# Altium PCB ludi_console_v1.PcbDoc
Units mil, origin at the board's own origin, x right, y up, seen from the top; angles counter-clockwise.
Board outline 2980.38 x 1980.03 mil, 2 copper layers (Top Layer, Bottom Layer); 18 components, 24 nets, 75 pads, 0 vias.
Unrouted connection lines stored in the file: 37.
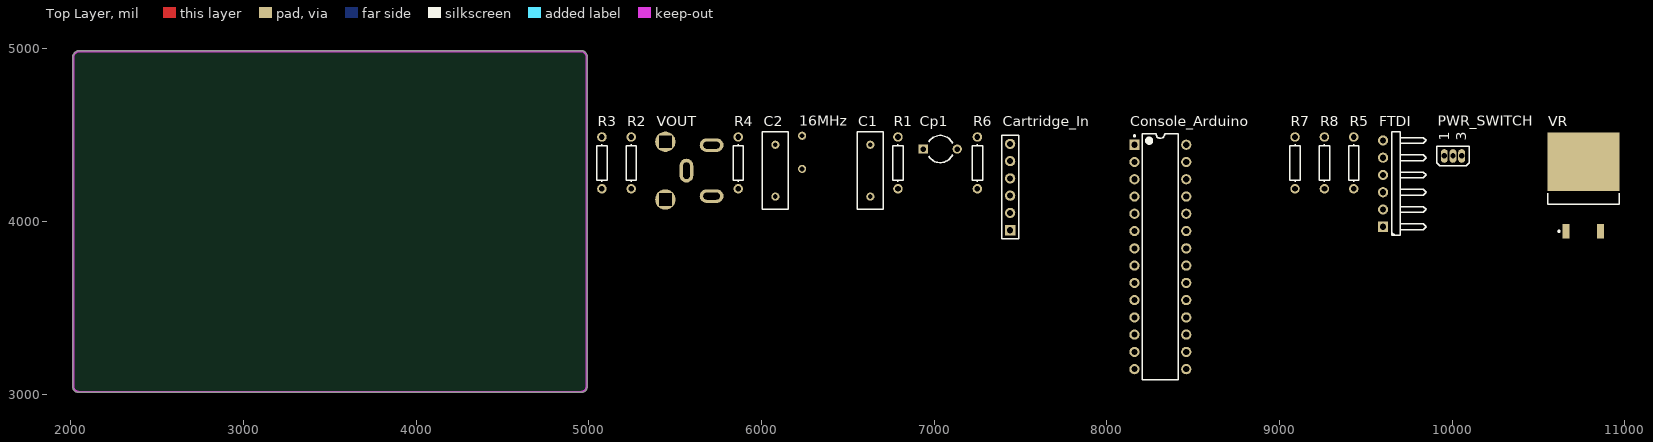
[diagram p0: Top Layer view]
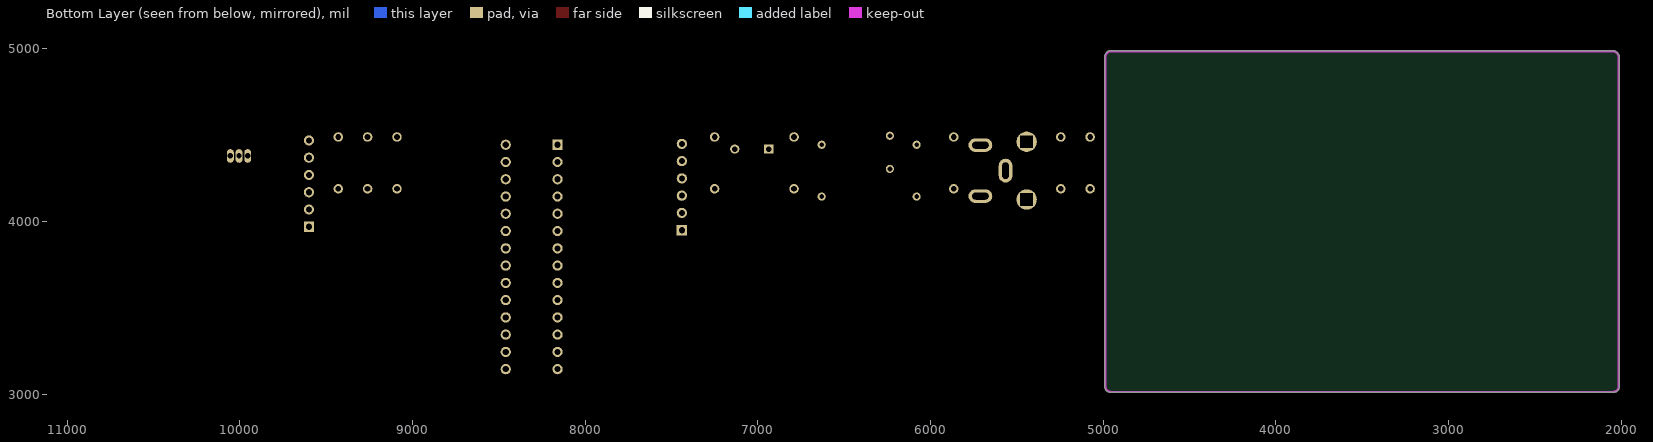
[diagram p1: Bottom Layer view, seen from below]

## Layer stack, top to bottom
Top Layer: signal copper 1.4
Dielectric: dielectric 12.6, FR-4, Dk 4.8
Bottom Layer: signal copper 1.4

## Board outline
2009.98,3045 2009.98,4944.66 cw(c2050,4950) 2010.04,4955.71 cw(c2050,4950) 2044.29,4989.96 cw(c2045,4985) 2045.03,4990.02 4955,4990.02 cw(c4955,4955) 4990.02,4955 4990.02,3045 cw(c4955,3045) 4955,3009.99 2045,3009.99 cw(c2045,3045)

## Design rules (kind name [scope] priority, off if disabled: settings)
Clearance [All] p1: gap=6
PolygonConnect [All] p1: connectstyle=Relief reliefconductorwidth=10 reliefentries=4 polygonreliefangle="90 Angle"
RoomDefinition ludi_console_v1 [InComponentClass('ludi_console_v1')] p1: confinementstyle=ConfineIn formatcopy=TRUE lockcomponents=FALSE outline 5035,3070 10980,3070 10980,4630 5035,4630
RoutingVias [All] p1: holewidth=13 width=30 viastyle="Through Hole" minholewidth=28 minwidth=50 maxholewidth=28 maxwidth=50
SilkscreenOverComponentPads [All] p1: minsilkscreentomaskgap=10
SolderMaskExpansion [All] p1: expansion=4
Width [All] p1: maxlimit=6 minlimit=6 preferedwidth=6
27 further rules are at their usual default settings.

## Components (designator, comment, footprint, x,y, rotation, side; value= is the part's Value field where it differs from the comment)
16MHz "Crystal" "Crystal - duplicate" 6235,4305 r90 top
C1 "Cap" RAD-0.3 6630,4295 r90 top
C2 "Cap" RAD-0.3 6080,4295 r90 top
Cartridge_In "Header 6" HDR1X6 7440,3950 r90 top
Console_Arduino "Atmega328" DIP-28 8310,3795 r0 top
Cp1 "Cap2" CAPR5-4X5 7035,4420 r0 top
FTDI "Header 6H" HDR1X6H 9600,3970 r90 top
PWR_SWITCH "MOSFET-N" E3 10005,4380 r90 top
R1 "Res1" AXIAL-0.3 6790,4340 r90 top
R2 "Res1" AXIAL-0.3 5245,4340 r90 top
R3 "Res1" AXIAL-0.3 5075,4340 r90 top
R4 "Res1" AXIAL-0.3 5865,4340 r90 top
R5 "Res1" AXIAL-0.3 9430,4340 r90 top
R6 "Res1" AXIAL-0.3 7250,4340 r90 top
R7 "Res1" AXIAL-0.3 9090,4340 r90 top
R8 "Res1" AXIAL-0.3 9260,4340 r90 top
VOUT "RCA_Jack" RCA_Jack 5565,4295 r0 top
VR "Volt Reg" D2PAK_L 10760,4210 r90 top

## Footprints (in the part's own frame and the unit in brackets; to place one, negate y for a bottom-side part, rotate by r counter-clockwise, add the part's x,y. Pads: shape width x height; smd on the part's side, far side on the other; paste and mask are expansions set on the pad)
AXIAL-0.3 [mm] "Axial Device, Thru-Hole; 2 Leads; 0.3 in Pin Spacing"
  round 1.4 hole 0.85: 1(-3.81,0) 2(3.81,0)
  silkscreen extent -2.77,-0.76 2.77,0.76
CAPR5-4X5 [mm] "Capacitor; 2 Leads"
  rect 1.35x1.35 hole 0.8: 1(-2.5,0)
  round 1.35 hole 0.8: 2(2.5,0)
  silkscreen extent -1.69,-2 1.82,2
"Crystal - duplicate" [mm]
  round 1.2 hole 0.7: A(0,0) K(4.88,0)
D2PAK_L [mm] "D2-PAK, 4-Leads, Body 8.8x10.4mm, Pitch 2.54mm, Lead Span 15.1mm, IPC High Density"
  rect 2.1x1 smd: 1(-6.75,2.54) 3(-6.75,-2.54)
  rect 8.6x10.6 smd: 2(3.5,0)
  silkscreen extent -6.87,-5.25 -1.2,5.25, body extent -2.75,-5.28 6.25,5.28, height 4.69
DIP-28 [mm] "DIP, 28-Pin, Row Spacing 7.62 mm, Pitch 2.54 mm"
  rect 1.5x1.5 hole 0.9: 1(-3.81,16.51)
  round 1.5 hole 0.9: 2(-3.81,13.97) 3(-3.81,11.43) 4(-3.81,8.89) 5(-3.81,6.35) 6(-3.81,3.81) 7(-3.81,1.27) 8(-3.81,-1.27) 9(-3.81,-3.81) 10(-3.81,-6.35) 11(-3.81,-8.89) 12(-3.81,-11.43) 13(-3.81,-13.97) 14(-3.81,-16.51) 15(3.81,-16.51) 16(3.81,-13.97) 17(3.81,-11.43) 18(3.81,-8.89) 19(3.81,-6.35) 20(3.81,-3.81) 21(3.81,-1.27) 22(3.81,1.27) 23(3.81,3.81) 24(3.81,6.35) 25(3.81,8.89) 26(3.81,11.43) 27(3.81,13.97) 28(3.81,16.51)
  silkscreen extent -3.93,-18.1 2.65,18.1, body extent -3.55,-18.1 3.55,18.1, height 5.33
E3 [mm] "TO, Flat Index; 3 In-Line, Axial Leads; Body Dia. 4.6mm; Lead Dia. 0.5 mm (max)"
  oval 2x1 hole 0.8: 1(0,1.27) 2(0,0) 3(0,-1.27)
  silkscreen extent -1.41,-2.41 1.41,2.41
HDR1X6 [mm] "Connector; Header; 6 Position"
  rect 1.5x1.5 hole 0.9: 1(0,0)
  round 1.5 hole 0.9: 2(2.54,0) 3(5.08,0) 4(7.62,0) 5(10.16,0) 6(12.7,0)
  silkscreen extent -1.27,-1.27 13.97,1.27
HDR1X6H [mm] "Connector; Header; 6 Position; Right Angle"
  rect 1.5x1.5 hole 0.9: 1(0,0)
  round 1.5 hole 0.9: 2(2.54,0) 3(5.08,0) 4(7.62,0) 5(10.16,0) 6(12.7,0)
  silkscreen extent -1.27,-6.35 13.97,-1.27
RAD-0.3 [mm] "Radial Cap, Thru-Hole; 2 Leads; 0.3 in Pin Spacing"
  round 1.2 hole 0.7: 1(-3.81,0) 2(3.81,0)
  silkscreen extent -5.71,-1.91 5.71,1.91
RCA_Jack [mm]
  oval 2x3.5 hole 1 slot 2.4 at 90 deg mask+0.025: 1(0,0)
  oval 3.5x2 hole 1 slot 2.4 at 0 deg mask+0.025: 2(3.7,3.75) 3(3.7,-3.75)
  round 3 hole 1.8 square mask+0.025: 4(-3.1,4.25) 5(-3.1,-4.25)

## Part data
C1 C2 Cp1: "Capacitor"
Cartridge_In: "Header, 6-Pin"
FTDI: "Header, 6-Pin, Right Angle"
PWR_SWITCH: "N-Channel MOSFET"
R1 R2 R3 R4 R5 R6 R7 R8: "Resistor"
VR: "Voltage Regulator"

## Nets (pads, with @x,y where several pads share a name; then routed paths per layer and width w, separated by ;. In a path a pad name is that pad's centre, name@x,y a point inside that pad or via, vN(x,y) a via of type N, cw(c..) or ccw(c..) an arc to the next point about the centre after c; other vN are vias at no path point)
5V: Cartridge_In.4 Console_Arduino.7 Console_Arduino.20 Console_Arduino.21 FTDI.4 PWR_SWITCH.3
GND: C1.1 C2.1 Cartridge_In.6 Console_Arduino.8 Console_Arduino.22 Cp1.2 FTDI.6 R1.1 R4.2 R7.1 VOUT.1 VR.2
MONO_OUT: Console_Arduino.17
Net16MHz_A: 16MHz.A C2.2 Console_Arduino.10
Net16MHz_K: 16MHz.K C1.2 Console_Arduino.9
NetConsole_Arduino_11: Console_Arduino.11
NetConsole_Arduino_12: Console_Arduino.12
NetConsole_Arduino_13: Console_Arduino.13 R3.1
NetConsole_Arduino_14: Console_Arduino.14
NetConsole_Arduino_15: Console_Arduino.15 R2.1
NetConsole_Arduino_16: Console_Arduino.16
NetConsole_Arduino_18: Console_Arduino.18
NetConsole_Arduino_19: Console_Arduino.19
NetCp1_1: Cp1.1 R6.1
NetPOWER_1: R7.2 R8.1
NetPOWER_6: R4.1
NetPWR_SWITCH_1: PWR_SWITCH.1 R8.2 VR.3
NetPWR_SWITCH_2: PWR_SWITCH.2 R5.2
NetPWR_Toggle_3: R5.1 R6.2
NetR2_2: R2.2 R3.2 VOUT.2 VOUT.3
NetVIN_2: VR.1
RST: Cartridge_In.1 Console_Arduino.1 FTDI.1 R1.2
RX: Cartridge_In.2 Console_Arduino.2 FTDI.3
TX: Cartridge_In.3 Console_Arduino.3 FTDI.2
pads on no net: Cartridge_In.5 Console_Arduino.4 Console_Arduino.5 Console_Arduino.6 Console_Arduino.23 Console_Arduino.24 Console_Arduino.25 Console_Arduino.26 Console_Arduino.27 Console_Arduino.28 FTDI.5 VOUT.4 VOUT.5

## Keep-outs
Keep-Out Layer:
  lines w10: 2015,4945 cw(c2050,4950) 2045,4985 4955,4985 cw(c4955,4955) 4985,4955 4985,3045 cw(c4955,3045) 4955,3015 2045,3015 cw(c2045,3045) 2015,3045 2015,4955

## Silkscreen, mask and mechanical layers (free items; w line width, h text height)
Drill Drawing:
  text ".LEGEND" at 5200,3200 h60
  text "Drill Drawing." at 5200,3100 h60

## Dimensions
2045,3015 to 2015,3045 on Mechanical 1
2015,3045 to 2045,3015 on Mechanical 1

## Text inside footprints (layer, text, board x,y; h text height)
PWR_SWITCH: Top Overlay "1" at 9983.15,4469.57 h59.05 r90; Top Overlay "3" at 10082.28,4469.57 h59.05 r90